# Altium PCB PCB2.PcbDoc
Units mm, origin at the board's own origin, x right, y up, seen from the top; angles counter-clockwise.
Board outline 152.4 x 101.6 mm, 2 copper layers (Top Layer, Bottom Layer); 15 components, 14 nets, 36 pads, 0 vias.
Unrouted connection lines stored in the file: 1.
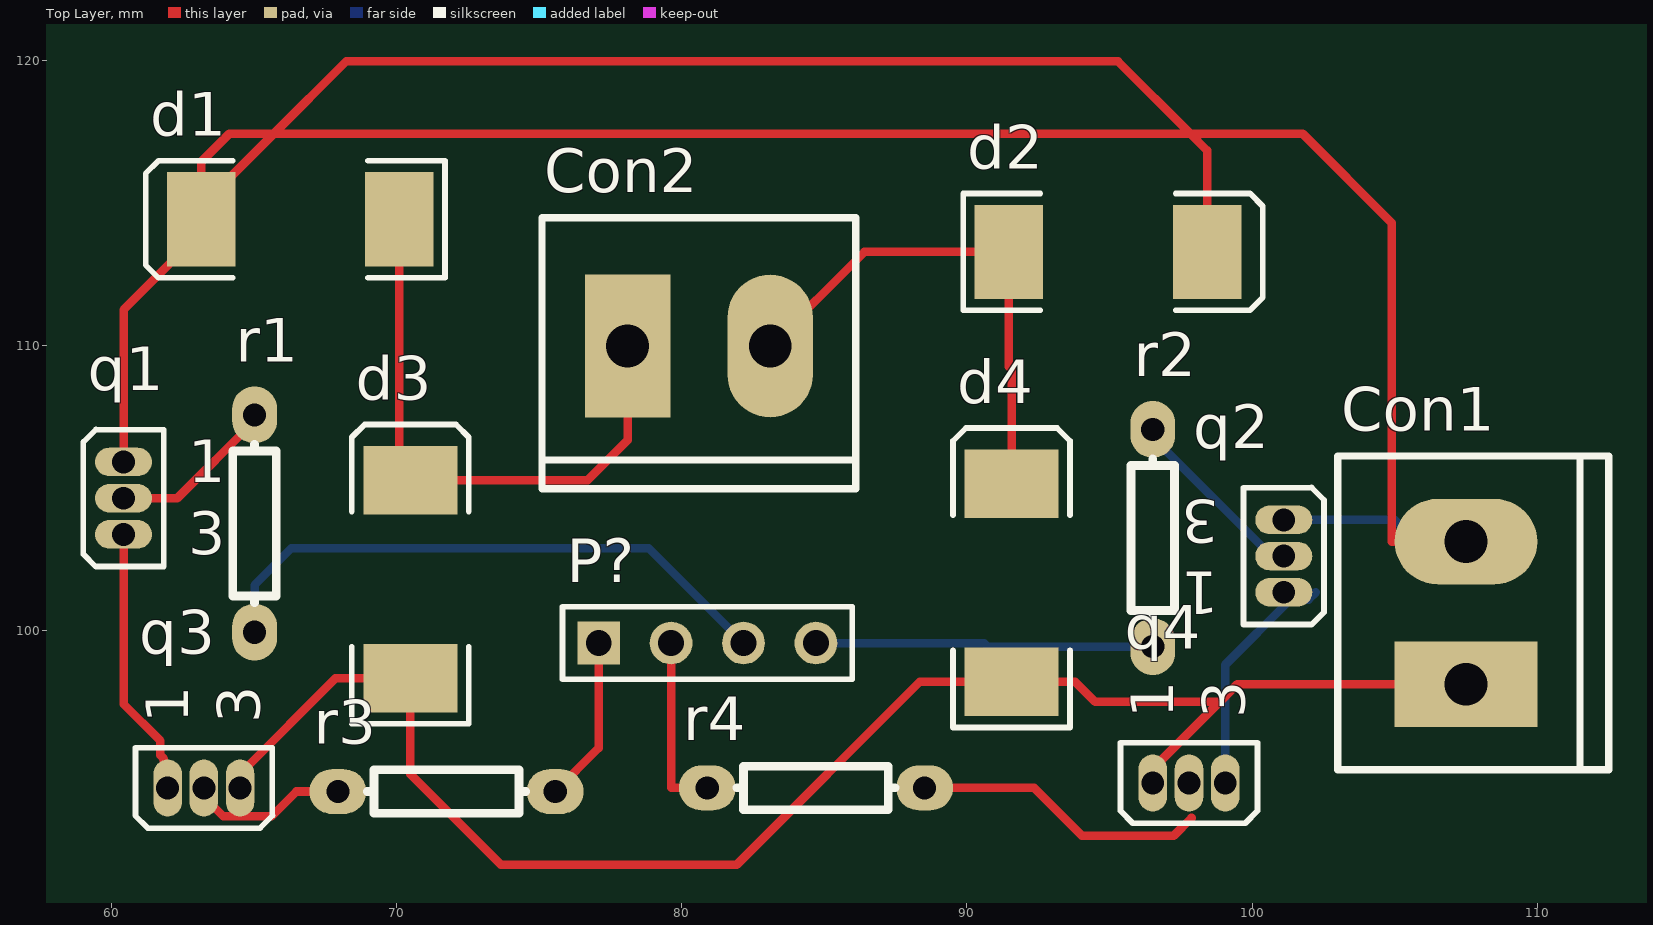
[diagram p0: Top Layer view]
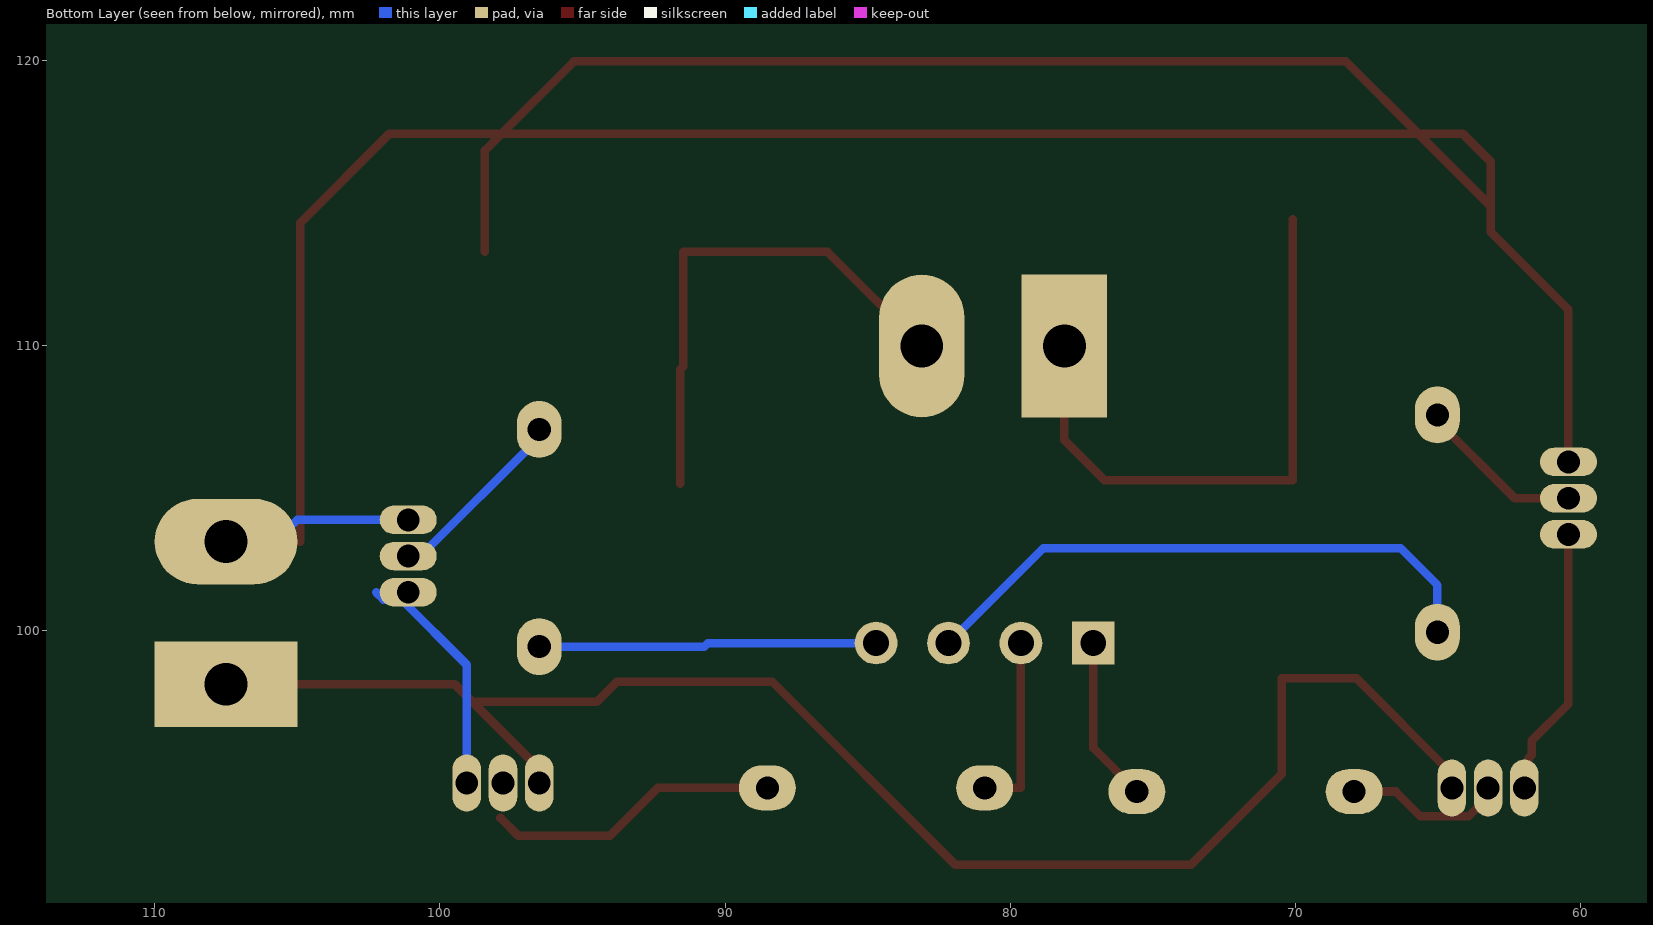
[diagram p1: Bottom Layer view, seen from below]

## Layer stack, top to bottom
Top Solder: solder mask 0.0102, Solder Resist, Dk 3.5
Top Layer: signal copper 0.0356
Dielectric 1: dielectric 0.32, FR-4, Dk 4.8
Bottom Layer: signal copper 0.0356
Bottom Solder: solder mask 0.0102, Solder Resist, Dk 3.5

## Board outline
25.4,25.4 177.8,25.4 177.8,127 25.4,127

## Design rules (kind name [scope] priority, off if disabled: settings)
Clearance [All] p1: gap=0.7 ignorepadtopadclearanceinfootprint=FALSE
PolygonConnect [All] p1: connectstyle=Relief reliefconductorwidth=0.254 reliefentries=4 polygonreliefangle="90 Angle" airgapwidth=0.254
RoutingVias [All] p1: holewidth=0.711 width=1.27 viastyle="Through Hole" minholewidth=0.711 minwidth=1.27 maxholewidth=0.711 maxwidth=1.27
SolderMaskExpansion [All] p1: expansion=0.102 istentingtop=FALSE
Width [All] p1: maxlimit=0.3 minlimit=0.3 preferedwidth=0.3 minimp=50.000000 maximp=50.000000 favimp=50.000000
30 further rules are at their usual default settings.

## Components (designator, comment, footprint, x,y, rotation, side; value= is the part's Value field where it differs from the comment)
Con1 "Terminal" "Terminal Block 2 Pin" 95.005,98.624 r270 top
Con2 "Terminal" "Terminal Block 2 Pin" 78.605,122.482 r180 top
d1 "Diode" SMC 66.629,114.427 r180 top
d2 "Diode" SMC 94.95,113.284 r0 top
d3 "Diode" SMC 70.485,101.808 r90 top
d4 "Diode" SMC 91.567,101.681 r90 top
P? "Header 4" HDR1X4 77.089,99.568 r0 top
q1 "MOSFET-N" E3 60.431,104.648 r0 top
q2 "MOSFET-N" E3 101.113,102.616 r180 top
q3 "MOSFET-P" E3 63.246,94.488 r90 top
q4 "MOSFET-P" E3 97.79,94.66 r90 top
r1 "RES1" AXIAL0.3 65.024,99.949 r90 top
r2 "RES1" AXIAL0.3 96.52,107.061 r270 top
r3 "RES1" AXIAL0.3 75.565,94.361 r180 top
r4 "RES1" AXIAL0.3 88.519,94.488 r180 top

## Footprints (in the part's own frame and the unit in brackets; to place one, negate y for a bottom-side part, rotate by r counter-clockwise, add the part's x,y. Pads: shape width x height; smd on the part's side, far side on the other; paste and mask are expansions set on the pad)
AXIAL0.3 [mil]
  oval 78.74x62 hole 32: 1(0,0) 2(300,0)
  silkscreen extent 41,-30 259,30
E3 [mm] "TO, Flat Index; 3 In-Line, Axial Leads; Body Dia. 4.6mm; Lead Dia. 0.5 mm (max)"
  oval 2x1 hole 0.8: 1(0,1.27) 2(0,0) 3(0,-1.27)
  silkscreen extent -1.41,-2.41 1.41,2.41
HDR1X4 [mm] "Connector; Header; 4 Position"
  rect 1.5x1.5 hole 0.9: 1(0,0)
  round 1.5 hole 0.9: 2(2.54,0) 3(5.08,0) 4(7.62,0)
  silkscreen extent -1.27,-1.27 8.89,1.27
SMC [mm] "DO-214-AB/SMC; 2 C-Bend Leads; Body 7.9 x 5.9 mm, inc. leads (LxW)"
  rect 2.4x3.3 smd: 1(-3.475,0) 2(3.475,0)
  silkscreen extent -5.07,-2.05 5.43,2.06
"Terminal Block 2 Pin" [mm]
  rect 3x5 hole 1.5: 1(0.5,12.5)
  oval 3x5 hole 1.5: 2(-4.5,12.5)
  silkscreen extent -7.5,8 3.5,17.5, body extent -7.08,8.3 3.68,16.5, height 10.25

## Part data
Con1 Con2: library part "Terminal Block 2", "Connector blue screw"
d1 d2 d3 d4: "Default Diode", Code_JEDEC=DO-214-AB, LatestRevisionDate=17-Jul-2002, LatestRevisionNote="Re-released for DXP Platform.", PackageDescription="DO-214-AB/SMC; 2 C-Bend Leads; Body 7.9 x 5.9 mm, inc. leads (LxW)", PackageReference=SMC, PackageVersion=Sep-1996, Published=8-Jun-2000, Publisher="Altium Limited"
P?: "Header, 4-Pin", LatestRevisionDate=17-Jul-2002, LatestRevisionNote="Re-released for DXP Platform.", Publisher="Altium Limited"
q1 q2: "N-Channel MOSFET", LatestRevisionDate=17-Jul-2002, LatestRevisionNote="Re-released for DXP Platform.", PackageDescription="TO, Flat Index; 3 In-Line, Axial Leads; Body Dia. 4.6mm; Lead Dia. 0.5 mm (max)", PackageReference=E3, PackageVersion=1995/1996, Published=8-Jun-2000, Publisher="Altium Limited"
q3 q4: "P-Channel MOSFET", LatestRevisionDate=17-Jul-2002, LatestRevisionNote="Re-released for DXP Platform.", PackageDescription="TO, Flat Index; 3 In-Line, Axial Leads; Body Dia. 4.6mm; Lead Dia. 0.5 mm (max)", PackageReference=E3, PackageVersion=1995/1996, Published=8-Jun-2000, Publisher="Altium Limited"

## Nets (pads, with @x,y where several pads share a name; then routed paths per layer and width w, separated by ;. In a path a pad name is that pad's centre, name@x,y a point inside that pad or via, vN(x,y) a via of type N, cw(c..) or ccw(c..) an arc to the next point about the centre after c; other vN are vias at no path point)
GND: Con1.1 d3.1 d4.1 q3.3 q4.1 | length 56.5
  Top Layer w0.3: q3.3@64.596,94.488 64.596,95.068 67.861,98.333 d3.1 70.485,94.971 73.66,91.796 81.931,91.796 88.341,98.206 d4.1 93.802,98.206 94.498,97.511 98.87,97.511 ; q4.1 96.52,95.16 98.87,97.511 ; Con1.1 99.484,98.124 98.87,97.511
in1: P?.1 r3.1 | length 5.8
  Top Layer w0.3: r3.1 77.089,95.885 P?.1
in2: P?.2 r4.2 | length 6.3
  Top Layer w0.3: P?.2 79.629,94.488 r4.2
in3: P?.3 r1.1 | length 20.7
  Bottom Layer w0.3: r1.1 65.024,101.6 66.319,102.895 78.842,102.895 P?.3
in4: P?.4 r2.2 | length 11.9
  Bottom Layer w0.3: P?.4 90.602,99.568 90.729,99.441 r2.2
NetCon2_1: Con2.1 d1.1 d3.2 | length 21
  Top Layer w0.3: d1.1 70.104,105.283 d3.2 76.708,105.283 78.105,106.68 Con2.1
NetCon2_2: Con2.2 d2.1 d4.2 | length 17.9
  Top Layer w0.3: Con2.2 86.407,113.284 d2.1 91.475,109.261 91.567,109.169 d4.2
Netq1_2: q1.2 r1.2 | length 5.9
  Top Layer w0.3: q1.2 62.316,104.648 65.024,107.356 r1.2
Netq1_3: q1.3 q3.1 | length 8.7
  Top Layer w0.3: q1.3 60.431,97.43 61.722,96.139 61.722,95.631 61.842,95.511 61.842,95.304 q3.1@61.896,95.25
Netq2_1: q2.1 q4.3 | length 8.4
  Bottom Layer w0.3: q4.3 99.06,98.806 101.346,101.092 101.981,101.092 102.235,101.346
Netq2_2: q2.2 r2.1 | length 6.6
  Bottom Layer w0.3: r2.1 96.52,106.779 100.683,102.616 q2.2
Netq3_2: q3.2 r3.2 | length 5.7
  Top Layer w0.3: q3.2 63.246,94.177 63.935,93.488 65.622,93.488 66.495,94.361 r3.2
Netq4_2: q4.2 r4.1 | length 10.3
  Top Layer w0.3: r4.1 92.361,94.488 94.039,92.81 97.255,92.81 97.878,93.433
VCC: Con1.2 d1.2 d2.2 q1.1 q2.3 | length 117.8
  Top Layer w0.3: q1.1 60.431,111.254 63.154,113.977 d1.2 d1.2@63.154,114.884 ; d2.2 98.425,116.84 97.841,117.424 ; Con1.2 104.902,103.124 104.902,114.3 101.778,117.424 97.841,117.424 ; d1.2@63.154,114.884 65.694,117.424 ; d1.2@63.154,114.884 63.154,116.443 64.135,117.424 65.694,117.424 ; 65.694,117.424 68.234,119.964 95.301,119.964 97.841,117.424 ; 65.694,117.424 97.841,117.424
  Bottom Layer w0.3: q2.3 105.012,103.886 105.774,103.124 Con1.2

## Text inside footprints (layer, text, board x,y; h text height)
q1: Top Overlay "1" at 62.706,105.203 h1.5; Top Overlay "3" at 62.706,102.685 h1.5
q2: Top Overlay "1" at 98.838,102.061 h1.5 r180; Top Overlay "3" at 98.838,104.579 h1.5 r180
q3: Top Overlay "1" at 62.691,96.763 h1.5 r90; Top Overlay "3" at 65.209,96.763 h1.5 r90
q4: Top Overlay "1" at 97.235,96.935 h1.5 r90; Top Overlay "3" at 99.753,96.935 h1.5 r90